# Altium PCB Driver Board.PcbDoc
Units mil, origin at the board's own origin, x right, y up, seen from the top; angles counter-clockwise.
Board outline 2700 x 2100 mil, 2 copper layers (Top Layer, Bottom Layer); 46 components, 34 nets, 167 pads, 7 vias.
Unrouted connection lines stored in the file: 13.
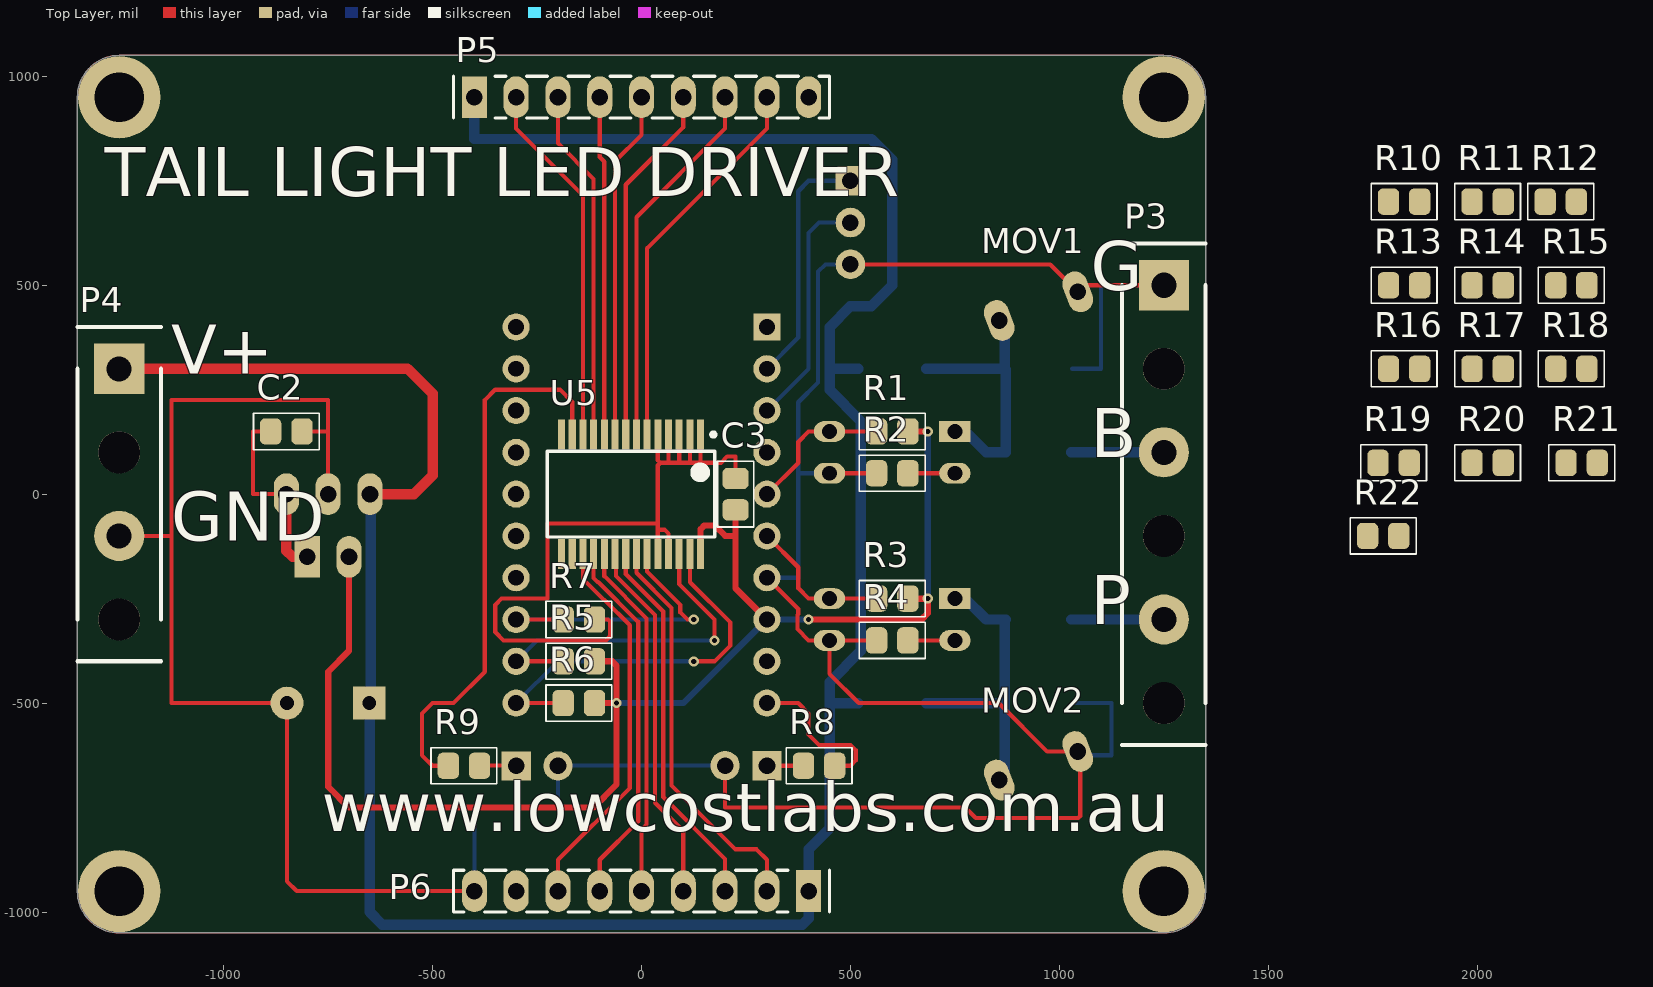
[diagram p0: Top Layer view]
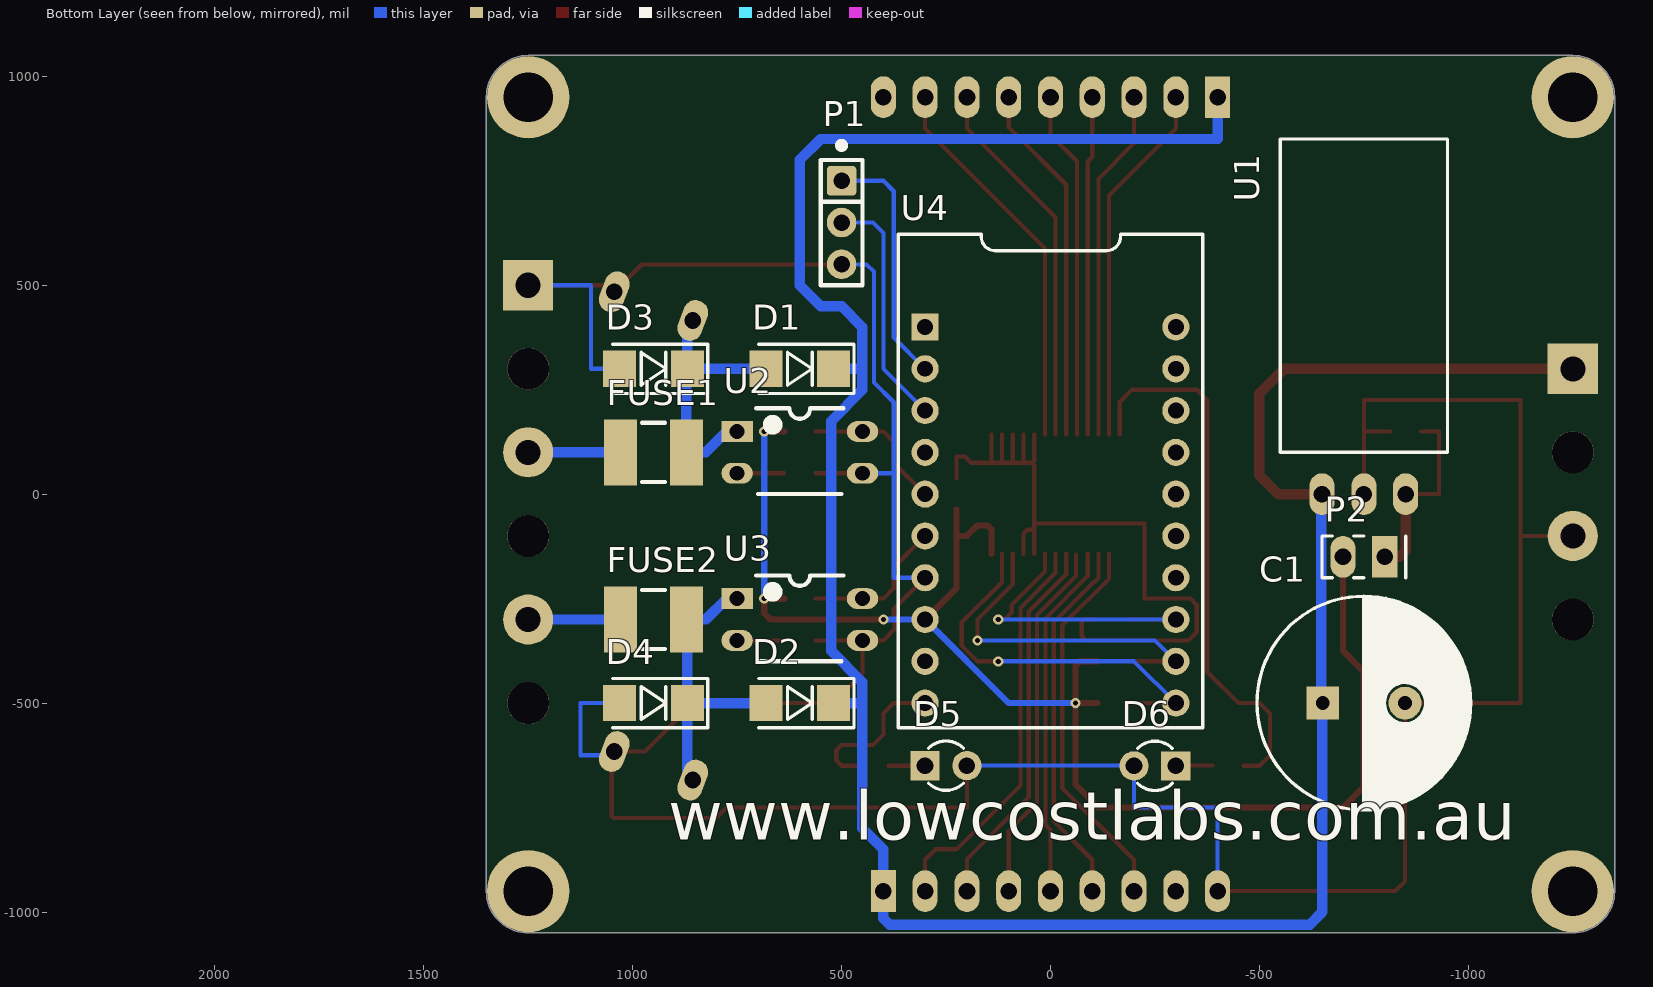
[diagram p1: Bottom Layer view, seen from below]

## Layer stack, top to bottom
Top Solder: solder mask 0.4, Solder Resist, Dk 3.5
Top Layer: signal copper 1.4
Dielectric 1: dielectric 12.6, FR-4, Dk 4.8
Bottom Layer: signal copper 1.4
Bottom Solder: solder mask 0.4, Solder Resist, Dk 3.5

## Board outline
-1350,-950 ccw(c-1250,-950) -1250,-1050 1250,-1050 ccw(c1250,-950) 1350,-950 1350,950 ccw(c1250,950) 1250,1050 -1250,1050 ccw(c-1250,950) -1350,950

## Design rules (kind name [scope] priority, off if disabled: settings)
Clearance [All] p1: gap=10
PolygonConnect [All] p1: connectstyle=Relief reliefconductorwidth=10 reliefentries=4 polygonreliefangle="90 Angle" airgapwidth=10
RoomDefinition "Tail Light Driver" [InComponentClass('Tail Light Driver')] p1: confinementstyle=ConfineIn formatcopy=TRUE lockcomponents=FALSE outline -3000,-2000 3000,-2000 3000,2000 -3000,2000
RoutingVias [All] p1: holewidth=28 width=50 viastyle="Through Hole" minholewidth=12 minwidth=24 maxholewidth=28 maxwidth=50
SolderMaskExpansion [All] p1: expansion=4
Width [All] p1: maxlimit=100 minlimit=10 preferedwidth=10
30 further rules are at their usual default settings.

## Components (designator, comment, footprint, x,y, rotation, side; value= is the part's Value field where it differs from the comment)
C1 "100uF" "CAPACITOR 12.5X20" -750,-500 r180 bottom
C2 "100nF" "CAPACITOR 0805" -850,150 r0 top
C3 "100nF" "CAPACITOR 0805" 225,0 r90 top
D1 "S1M" DO-214AC 600,300 r180 bottom
D2 "S1M" DO-214AC 600,-500 r180 bottom
D3 "S1M" DO-214AC 950,300 r180 bottom
D4 "S1M" DO-214AC 950,-500 r180 bottom
D5 "LED (BLUE)" "LED(3D) 3MM VERTICAL (GREEN)" 250,-650 r0 bottom
D6 "LED (BLUE)" "LED(3D) 3MM VERTICAL (GREEN)" -250,-650 r180 bottom
FUSE1 "1A" "miniSMD Polyswitch" 950,100 r180 bottom
FUSE2 "1A" "miniSMD Polyswitch" 950,-300 r180 bottom
MOV1 "FTR FTR07D270K 22V" "MOV - 10mm" 950,450 r20 top
MOV2 "FTR FTR07D270K 22V" "MOV - 10mm" 950,-650 r20 top
P1 "DEBUG" "Pin Header 1x3 TH Pitch 2.54mm" 500,750 r270 bottom
P2 "5V SET" "HEADER 1x2" -750,-150 r0 bottom
P3 "Header 3" TAIL 1250,0 r270 top
P4 "PSU IN" POWER -1250,0 r270 top
P5 "Header 9" "HEADER 1x9" 0,950 r0 top
P6 "Header 9" "HEADER 1x9" 0,-950 r180 top
R1 "1k" "RESISTOR 0805" 600,150 r180 top
R2 "1k" "RESISTOR 0805" 600,50 r180 top
R3 "1k" "RESISTOR 0805" 600,-250 r180 top
R4 "1k" "RESISTOR 0805" 600,-350 r180 top
R5 "1k" "RESISTOR 0805" -150,-400 r180 top
R6 "1k" "RESISTOR 0805" -150,-500 r180 top
R7 "1k" "RESISTOR 0805" -150,-300 r180 top
R8 "1k" "RESISTOR 0805" 425,-650 r0 top
R9 "1k" "RESISTOR 0805" -425,-650 r180 top
R10 "1k" "RESISTOR 0805" 1825,700 r180 top
R11 "1k" "RESISTOR 0805" 2025,700 r180 top
R12 "1k" "RESISTOR 0805" 2200,700 r180 top
R13 "1k" "RESISTOR 0805" 1825,500 r180 top
R14 "1k" "RESISTOR 0805" 2025,500 r180 top
R15 "1k" "RESISTOR 0805" 2225,500 r180 top
R16 "1k" "RESISTOR 0805" 1825,300 r180 top
R17 "1k" "RESISTOR 0805" 2025,300 r180 top
R18 "1k" "RESISTOR 0805" 2225,300 r180 top
R19 "1k" "RESISTOR 0805" 1800,75 r180 top
R20 "1k" "RESISTOR 0805" 2025,75 r180 top
R21 "1k" "RESISTOR 0805" 2250,75 r180 top
R22 "1k" "RESISTOR 0805" 1775,-100 r180 top
U1 "7805 Replacement Module" "7805 Replacement Module" -750,0 r180 bottom
U2 "OPTO FL817" DIP_4 600,100 r180 bottom
U3 "OPTO FL817" DIP_4 600,-300 r180 bottom
U4 "STM8 Breakout" "STM8 Breakout" 0,0 r270 bottom
U5 "PCA9685PW,118" SSOP28 -25,0 r180 top

## Footprints (in the part's own frame and the unit in brackets; to place one, negate y for a bottom-side part, rotate by r counter-clockwise, add the part's x,y. Pads: shape width x height; smd on the part's side, far side on the other; paste and mask are expansions set on the pad)
"7805 Replacement Module" [mil]
  oval 60x100 hole 40: 1(-100,0) 2(0,0) 3(100,0)
  silkscreen extent -200,100 200,850, body extent -205,-91 205,854, height 292
"CAPACITOR 12.5X20" [mm] "CAPACITOR ALUMINIUM ELECTROLYTIC D=12.5MM H=20MM"
  rect 2x2 hole 0.85: 1(-2.5,0)
  round 2 hole 0.85: 2(2.5,0)
  silkscreen extent -6.5,-6.5 6.5,6.5, body extent -6.5,-6.5 6.5,6.5, height 22
"CAPACITOR 0805" [mm]
  rrect50% 1.3x1.6 smd: 1(-0.95,0) 2(0.95,0)
  silkscreen extent -2,-1.1 2,1.1, body extent -1.25,-0.62 1.25,0.62, height 0.8
DIP_4 [mm]
  rect 1.905x1.27 hole 0.9: 1(-3.81,1.27)
  oval 1.905x1.27 hole 0.9: 2(-3.81,-1.27) 3(3.81,-1.27) 4(3.81,1.27)
  silkscreen extent -2.65,-2.54 2.65,2.68, body extent -4,-2.92 4,2.62, height 4.31
DO-214AC [mm]
  rect 2x2.2 smd: 1(-2.057,0) 2(2.057,0)
  silkscreen extent -2.5,-1.5 3.3,1.5, body extent -2.65,-1.4 2.65,1.4, height 2.3
"HEADER 1x2" [mil]
  rect 60x100 hole 40: 1(-50,0)
  oval 60x100 hole 40: 2(50,0)
  silkscreen extent -100,-50 100,50, body extent -100,-50 100,50, height 374
"HEADER 1x9" [mil]
  rect 60x100 hole 40: 1(-400,0)
  oval 60x100 hole 40: 2(-300,0) 3(-200,0) 4(-100,0) 5(0,0) 6(100,0) 7(200,0) 8(300,0) 9(400,0)
  silkscreen extent -450,-50 450,50
"LED(3D) 3MM VERTICAL (GREEN)" [mil]
  rect 70x70 hole 40: 1(50.06,-0.28)
  round 70 hole 40: 2(-49.94,-0.28)
  silkscreen extent -42,-59 42,59, body extent -65,-65 61,64, height 196
"miniSMD Polyswitch" [mm] "RAYCHEM - MINISMDC050F-2"
  rect 2x4 smd: 1(-2,0) 2(2,0)
  silkscreen extent -0.7,-1.8 0.7,1.8, body extent -2.4,-1.7 2.4,1.7, height 0.62
"MOV - 10mm" [mil]
  oval 60x100 hole 40: 1(-100,0) 2(100,0)
  body extent -164,-122 164,122, height 426
"Pin Header 1x3 TH Pitch 2.54mm" [mm] "PinHeader 1x3 TH Pitch 2.54mm"
  rrect25% 1.8x1.8 hole 1: 1(0,0)
  round 1.8 hole 1: 2(2.54,0) 3(5.08,0)
  silkscreen extent -2.3,-1.27 6.35,1.27, body extent -1.27,-1.27 6.35,1.27, height 9.5
POWER [mil] "Connector; Header; 3 Position"
  rect 120x120 hole 60: 1(-300,0)
  round 120 hole 60: 2(100,0)
  round 100 hole 100: H1(-100,0) H2(300,0)
  silkscreen extent -400,-100 400,100
"RESISTOR 0805" [mm]
  rrect50% 1.3x1.6 smd: 1(-0.95,0) 2(0.95,0)
  silkscreen extent -2,-1.1 2,1.1, body extent -1.25,-0.62 1.25,0.62, height 0.8
SSOP28 [mil]
  rect 17x72 smd: 1(-166.34,-142.72) 2(-140.75,-142.72) 3(-115.16,-142.72) 4(-89.57,-142.72) 5(-63.98,-142.72) 6(-38.39,-142.72) 7(-12.8,-142.72) 8(12.8,-142.72) 9(38.38,-142.72) 10(63.97,-142.72) 11(89.56,-142.72) 12(115.15,-142.72) 13(140.74,-142.72) 14(166.33,-142.72) 15(166.33,142.72) 16(140.74,142.72) 17(115.15,142.72) 18(89.56,142.72) 19(63.97,142.72) 20(38.38,142.72) 21(12.8,142.72) 22(-12.8,142.72) 23(-38.39,142.72) 24(-63.98,142.72) 25(-89.57,142.72) 26(-115.16,142.72) 27(-140.75,142.72) 28(-166.34,142.72)
  silkscreen extent -205,-148 201,102, body extent -203,-153 203,153, height 85
"STM8 Breakout" [mil] "STM8S103F3P6 Dev board"
  rect 65x65 hole 38: 1(-400,-300)
  round 65 hole 38: 2(-300,-300) 3(-200,-300) 4(-100,-300) 5(0,-300) 6(100,-300) 7(200,-300) 8(300,-300) 9(400,-300) 10(500,-300) 11(500,300) 12(400,300) 13(300,300) 14(200,300) 15(100,300) 16(0,300) 17(-100,300) 18(-200,300) 19(-300,300) 20(-400,300)
  silkscreen extent -622,-364 559,364, body extent -622,-364 559,364, height 497
TAIL [mil] "Connector; Header; 3 Position"
  rect 120x120 hole 60: 1(-500,0)
  round 120 hole 60: 2(-100,0) 3(300,0)
  round 100 hole 100: H1(-300,0) H2(100,0) H3(500,0)
  silkscreen extent -600,-100 600,100

## Part data
C1: library part "Cap Pol1", "Polarized Capacitor (Radial)"
C2 C3: library part CAP, "CAPACITOR SMD 0603"
D1 D2 D3 D4: library part DIODE, "DIODE, POWER"
D5 D6: library part "LED 3mm RED", "3mm RED LED"
FUSE1 FUSE2: library part "POLYSWITCH 500mA", "POLYSWITCH 1A"
MOV1 MOV2: library part VARISTOR
P1: library part "Header 3", "Header, 3 Pin"
P2 P4: library part "Header 2", "Header, 2-Pin"
P3: "Header, 3-Pin"
P5 P6: "Header, 9-Pin"
R1 R2 R3 R4 R5 R6 R7 R8 R9 R10 R11 R12 R13 R14 R15 R16 R17 R18 R19 R20 R21 R22: library part Res2, "Resistor"
U1: "3-Terminal Positive Fixed Voltage Regulator"
U2 U3: library part FL817, "4-Pin Phototransistor Optocoupler"
U5: "LED Driver IC 16 Output Linear PWM Dimming 25mA 28-TSSOP"

## Free pads (board coordinates)
  round 196.85 hole 118.11 unplated: MNT(-1250,-950) MNT(-1250,950) MNT(-1250,950) MNT(1250,-950) MNT(1250,950)

## Via types
v1: diameter 24, hole 12, Top Layer to Bottom Layer, 7 vias

## Nets (pads, with @x,y where several pads share a name; then routed paths per layer and width w, separated by ;. In a path a pad name is that pad's centre, name@x,y a point inside that pad or via, vN(x,y) a via of type N, cw(c..) or ccw(c..) an arc to the next point about the centre after c; other vN are vias at no path point)
BRAKE: D1.1 D3.2 FUSE1.2 MOV1.1 U2.1 | length 652.1
  Bottom Layer w25: D1.1 D3.2 ; U2.1 775,150 825,100 FUSE1.2 871.26,297.74 D3.2 ; MOV1.1 869,402.83 D3.2
BRAKE_IN: R1.2 U2.4 U4.5 | length 354
  Top Layer w10: U4.5 375,75 375,125 400,150 U2.4 R1.2
DRIVE_0: P5.2 R10.1 U5.12 | length 873.5
  Top Layer w10: P5.2 -300,875 -140.15,715.15 U5.12
DRIVE_1: P5.3 R11.1 U5.11 | length 842.7
  Top Layer w10: P5.3 -200,840 -114.56,754.56 U5.11
DRIVE_2: P5.4 R12.1 U5.10 | length 811.8
  Top Layer w10: P5.4 -100,806.57 -88.97,795.54 U5.10
DRIVE_3: P5.5 R13.1 U5.9 | length 833.5
  Top Layer w10: U5.9 -63.38,796.62 0,860 P5.5
DRIVE_4: P5.6 R14.1 U5.8 | length 864.4
  Top Layer w10: U5.8 -37.8,740.49 100,878.28 P5.6
DRIVE_5: P5.7 R15.1 U5.7 | length 895.2
  Top Layer w10: U5.7 -12.2,662.8 200,875 P5.7
DRIVE_6: P5.8 R16.1 U5.6 | length 926
  Top Layer w10: U5.6 13.39,588.39 300,875 P5.8
DRIVE_7: P6.7 R22.1 U5.17 | length 925.9
  Top Layer w10: P6.7 -200,-875 -27.99,-702.99 -27.99,-313.8 -88.29,-253.5 -89.78,-253.5 -140,-203.28 -140,-142.87 U5.17
DRIVE_8: P6.6 R21.1 U5.18 | length 890.4
  Top Layer w10: U5.18 -114.56,-200.44 -105,-210 -103.51,-210 -7.99,-305.52 -7.99,-782.99 -100,-875 P6.6
DRIVE_9: P6.5 R20.1 U5.19 | length 854.1
  Top Layer w10: U5.19 -88.97,-196.25 12.01,-297.23 12.01,-791.28 0,-803.28 P6.5
DRIVE_10: P6.4 R19.1 U5.20 | length 872
  Top Layer w10: U5.20@-61.3,-144.81 -61.3,-195.65 32.01,-288.95 32.01,-738.58 100,-806.57 P6.4
DRIVE_11: P6.3 R18.1 U5.21 | length 905.8
  Top Layer w10: U5.21 -37.8,-190.86 52.01,-280.66 52.01,-725 200,-872.99 P6.3
DRIVE_12: P6.2 R17.1 U5.22 | length 965.9
  Top Layer w10: U5.22 -12.2,-188.17 72.01,-272.38 72.01,-697.01 225,-850 275,-850 300,-875 P6.2
GND: C1.2 C2.2 C3.2 D3.1 D4.1 D5.2 D6.2 MOV1.2 MOV2.2 P1.3 P3.1 P4.2 P5.9 P6.9 R2.2 R4.2 R7.1 U1.2 U2.3 U3.3 U4.7 U5.1 U5.2 U5.3 U5.4 U5.5 U5.14 U5.24 U5.25 | length 10283.6
  Top Layer w10: P4.2 -1125,-100 ; C2.2 -750,150 ; U1.2 -750,150 ; P6.9 -825,-950 -848.43,-926.57 C1.2 -1125,-500 -1125,-100 ; R7.1 -80,-300 -75,-305 -75,-340 -85,-350 -330,-350 -350,-330 -350,-265 -335,-250 -225,-250 -225,-70 38.98,-70 ; U5.24 38.98,-85 ; U5.5 38.98,81.02 45,75 ; U5.25 64.57,-94.57 55,-85 38.98,-85 ; 64.57,75.43 U5.4 ; 90.16,75.16 U5.3 ; 115.75,75.75 U5.2 ; 141.34,76.34 U5.1 ; D5.2@200.06,-650.28 200.06,-749.94 200,-750 775,-750 800,-775 1045,-775 1050,-770 1050,-621.83 MOV2.2 970.8,-615.8 855,-500 520,-500 450,-430 U3.3 ; C3.2 225,90 205,90 190,75 45,75 ; U4.7 375,-275 375,-286.82 373,-288.82 373,-323 400,-350 U3.3 ; U2.3 R2.2 ; P1.3 978.17,550 MOV1.2 1059.77,500 P3.1 ; R4.2 U3.3 ; -1125,-100 -1125,225 -750,225 -750,150 ; 38.98,-85 38.98,-70 ; 38.98,-70 38.98,68.98 45,75
  Bottom Layer w10: P6.9 -400,-750 -200,-750 -200.06,-749.94 -200.06,-649.72 199.49,-649.72 D5.2@200.06,-650.28 ; U4.7 375,-200 375,50 ; U2.3 375,50 ; P1.3 440,550 422.5,532.5 422.5,267.5 375,220 375,50 ; D4.1 1125,-500 1125,-625 1053.17,-625 MOV2.2 ; D3.1 1100,300 1100,500 P3.1
LED_0: R8.2 U4.10 | length 368.7
  Top Layer w10: U4.10 375,-500 400,-525 400,-575 425,-600 500,-600 512.5,-612.5 512.5,-637.5 500,-650 R8.2
LED_1: R9.2 U5.13 | length 1324.1
  Top Layer w10: R9.2 -500,-650 -525,-625 -525,-525 -500,-500 -450,-500 -375,-425 -375,225 -350,250 -195,250 -165.74,220.74 U5.13
NetC2_1: C2.1 P2.1 U1.3 | length 463.8
  Top Layer w10: C2.1 -930,150 -930,0 U1.3
  Top Layer w25: U1.3 -850,-135 -835,-150 P2.1
NetD5_1: D5.1 R8.1 | length 87.7
  Top Layer w10: D5.1@300.06,-650.28 300.34,-650 R8.1
NetD6_1: D6.1 R9.1 | length 87.3
  Top Layer w10: R9.1@-387.31,-649.72 D6.1@-300.06,-649.72
NetFUSE1_1: FUSE1.1 P3.2 | length 221.3
  Bottom Layer w25: FUSE1.1 P3.2
NetFUSE2_1: FUSE2.1 P3.3 | length 221.3
  Bottom Layer w25: FUSE2.1 P3.3
NetR2_1: R2.1 U2.2 | length 112.6
  Top Layer w10: R2.1 U2.2
NetR4_1: R4.1 U3.2 | length 112.6
  Top Layer w10: R4.1 U3.2
O\E\: R7.2 U4.13 U5.23 | length 749.9
  Top Layer w10: U4.13 R7.2 ; U5.23 13.39,-185.47 92.91,-265 92.91,-282.91 110,-300 v1(125,-300)
  Bottom Layer w10: U4.13 v1(125,-300)
PARK: D2.1 D4.2 FUSE2.2 MOV2.1 U3.1 | length 720.5
  Bottom Layer w25: D2.1 D4.2 ; U3.1 775,-250 825,-300 FUSE2.2 869,-302.26 D4.2 ; MOV2.1 869,-671.23 D4.2
PARK_IN: R3.2 U3.4 U4.6 | length 354
  Top Layer w10: U4.6 375,-175 375,-225 400,-250 U3.4 R3.2
RX: P1.2 U4.3 | length 576.8
  Bottom Layer w10: U4.3 400,300 400,625 425,650 P1.2
SCL: R5.2 U4.12 U5.26 | length 850.7
  Top Layer w10: U4.12 R5.2 ; U5.26 90.16,-215.16 175,-300 v1(175,-350)
  Bottom Layer w10: U4.12 -250,-350 v1(175,-350)
SDA: R6.2 U4.11 U5.27 | length 941.9
  Top Layer w10: U4.11 R6.2 ; U5.27 115.75,-210.75 212.5,-307.5 212.5,-362.5 175,-400 v1(125,-400)
  Bottom Layer w10: U4.11 -200,-400 v1(125,-400)
TX: P1.1 U4.2 | length 591.4
  Bottom Layer w10: U4.2 375,375 375,725 400,750 P1.1
V+: C1.1 D1.2 D2.2 P4.1 P5.1 P6.1 U1.1 | length 6458.5
  Top Layer w25: P4.1 -560,300 -500,240 -500,45 -545,0 U1.1
  Bottom Layer w25: U1.1 -647.5,-2.5 -647.5,-495.93 C1.1 -650,-501.57 -650,-1000 -620,-1030 385,-1030 400,-1015 P6.1 400,-850 450,-800 450,-500 ; P5.1 -400,850 550,850 600,800 600,500 550,450 500,450 450,400 450,300 ; D2.2 450,-500 ; D1.2 450,300 ; 450,-500 450,-450 525,-375 525,175 450,250 450,300
VCC: C3.1 P2.2 R1.1 R3.1 R5.1 R6.1 U4.8 U5.28 | length 3518.1
  Top Layer w15: P2.2 -700,-375 -750,-425 -750,-700 -700,-750 -115,-750 -60,-695 v1(-60,-500) ; R6.1 v1(-60,-500) ; R5.1 -70,-400 -60,-410 v1(-60,-500) ; U5.28 141.34,-83.66 150,-75 175,-75 200,-100 225,-100 ; C3.1 225,-100 ; U4.8 225,-225 225,-100 ; v1(400,-300) 670,-300 685,-285 v1(685,-250) R3.1 ; R1.1 v1(685,150)
  Bottom Layer w15: v1@-60,-505 v1(-60,-500) 100,-500 U4.8 v1(400,-300) ; v1(685,-250) v1(685,150)
pads on no net: P3.H1 P3.H2 P3.H3 P4.H1 P4.H2 P6.8 R10.2 R11.2 R12.2 R13.2 R14.2 R15.2 R16.2 R17.2 R18.2 R19.2 R20.2 R21.2 R22.2 U4.1 U4.4 U4.9 U4.14 U4.15 U4.16 U4.17 U4.18 U4.19 U4.20 U5.15 U5.16

## Polygon pours and split planes (outlines as drawn)
GND on Top Layer "TOP GND" (solid, remove dead copper, shelved, pour order 0): -1350,-950 ccw(c-1250,-950) -1250,-1050 1250,-1050 ccw(c1250,-950) 1350,-950 1350,950 ccw(c1250,950) 1250,1050 -1250,1050 ccw(c-1250,950) -1350,950
GND on Bottom Layer "BOTTOM GND" (solid, remove dead copper, shelved, pour order 1): -1350,-950 ccw(c-1250,-950) -1250,-1050 1250,-1050 ccw(c1250,-950) 1350,-950 1350,950 ccw(c1250,950) 1250,1050 -1250,1050 ccw(c-1250,950) -1350,950

## Silkscreen, mask and mechanical layers (free items; w line width, h text height)
Top Overlay:
  text "TAIL LIGHT LED DRIVER" at -1285,675 h200
  text "G" at 1075,450 h200
  text "V+" at -1125,250 h200
  text "B" at 1075,50 h200
  text "GND" at -1125,-150 h200
  text "P" at 1075,-350 h200
  text "www.lowcostlabs.com.au" at -765,-845 h200
Bottom Overlay:
  text "www.lowcostlabs.com.au" at 915,-865 h200
Mechanical 1:
  lines w7.87: -1350,-950 ccw(c-1250,-950) -1250,-1050 0,-1050 1250,-1050 ccw(c1250,-950) 1350,-950 1350,0 1350,950 ccw(c1250,950) 1250,1050 -1250,1050 ccw(c-1250,950) -1350,950 -1350,0 -1350,-950